# Altium PCB ESP-C3-13-BREAKOUT.PcbDoc
Units mm, origin at the board's own origin, x right, y up, seen from the top; angles counter-clockwise.
Board outline 25.46 x 25.46 mm, 2 copper layers (Top Layer, Bottom Layer), stack 1.57 mm thick; 11 components, 22 nets, 69 pads, 23 vias.
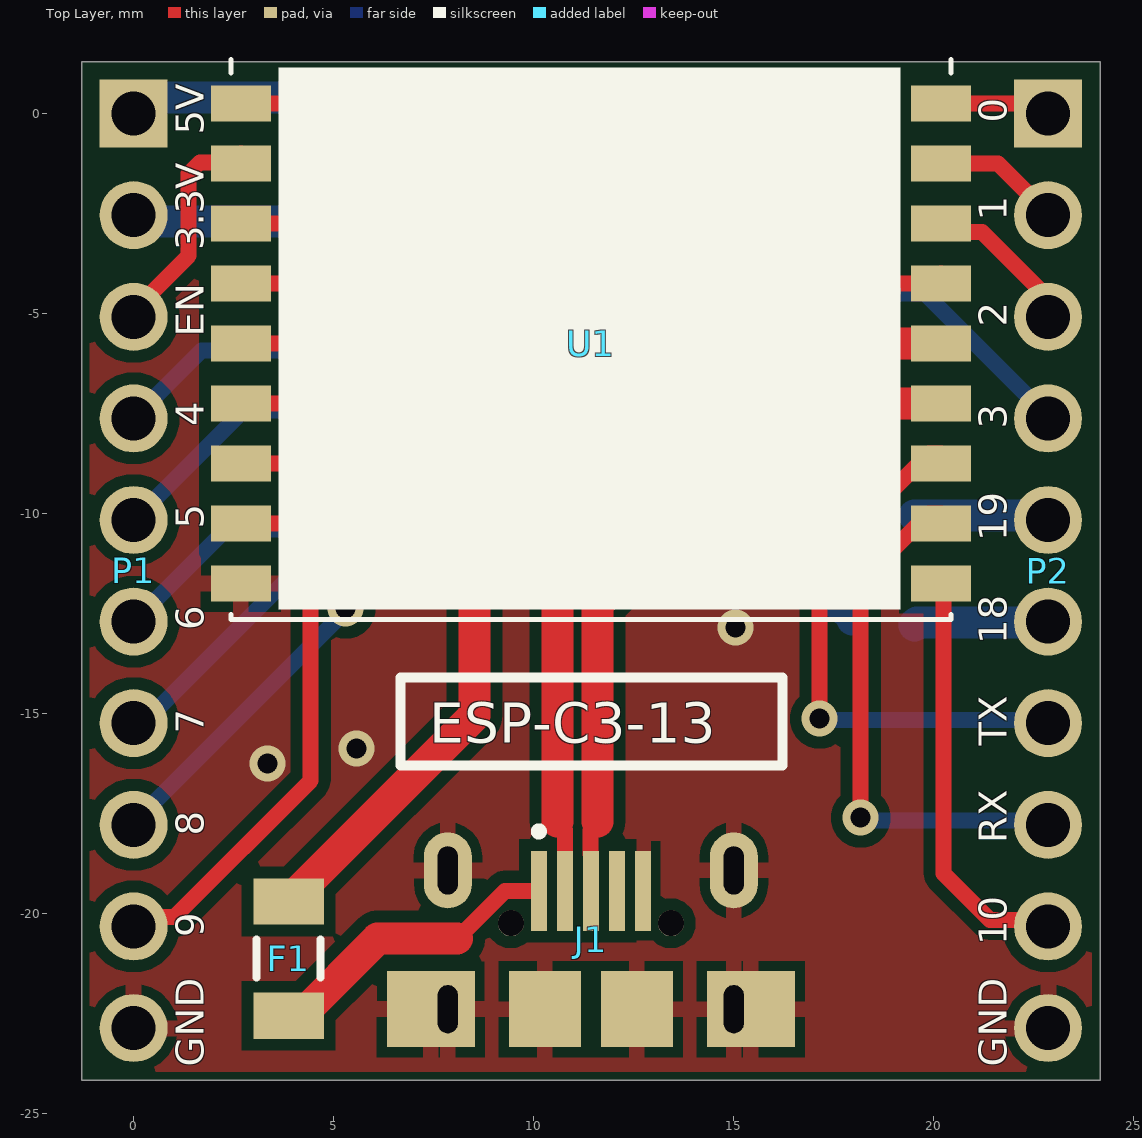
[diagram p0: Top Layer view]
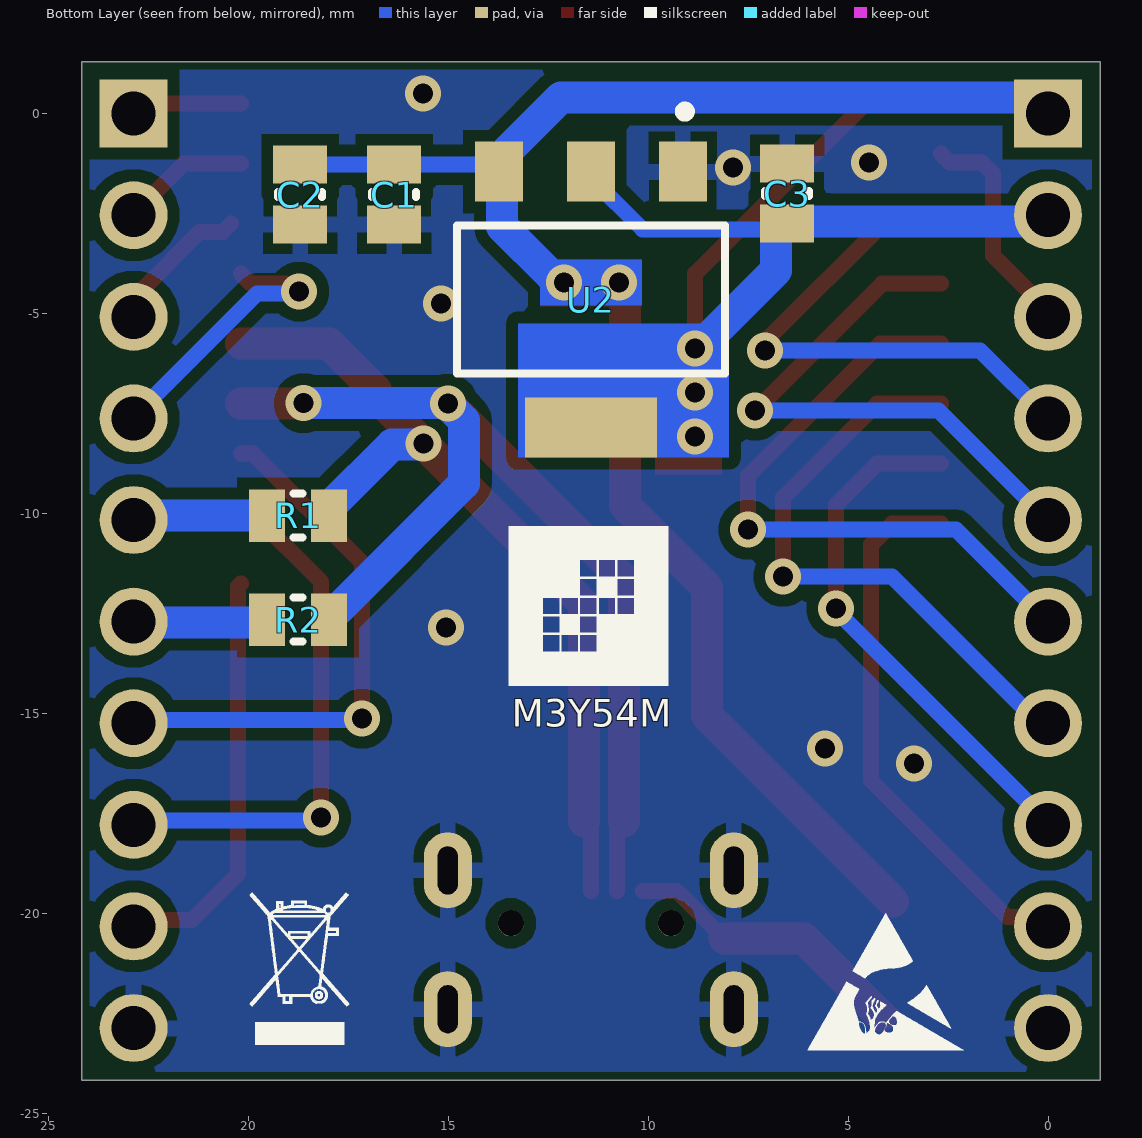
[diagram p1: Bottom Layer view, seen from below]
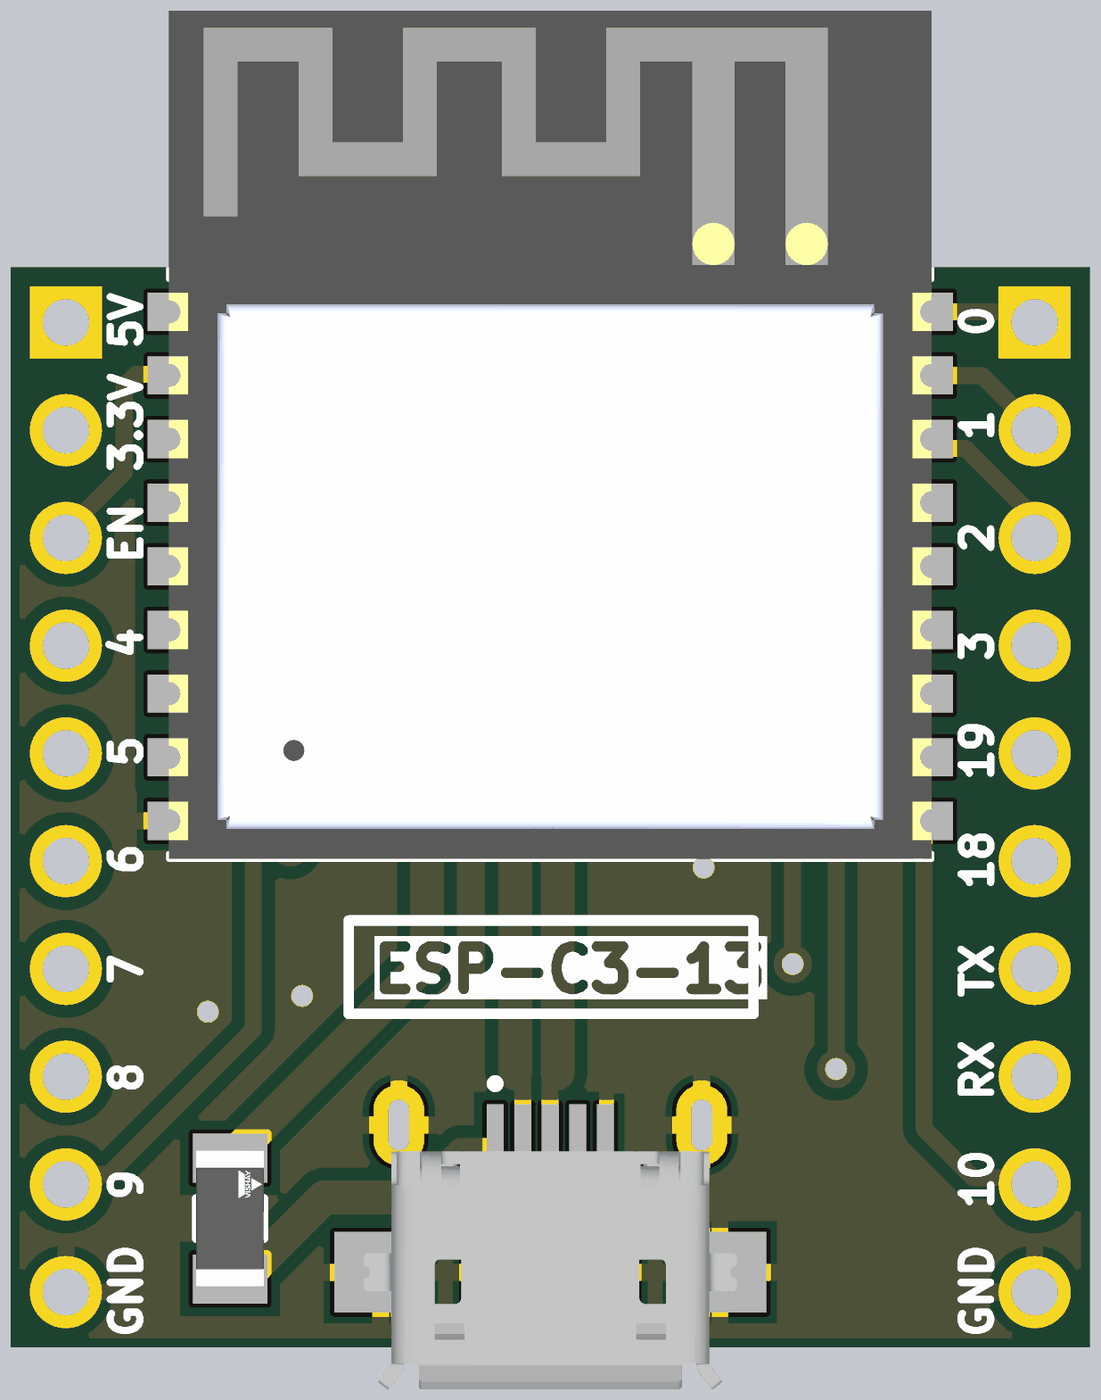
[diagram p2: 3D render of the assembled board from above, using the file's embedded part models]
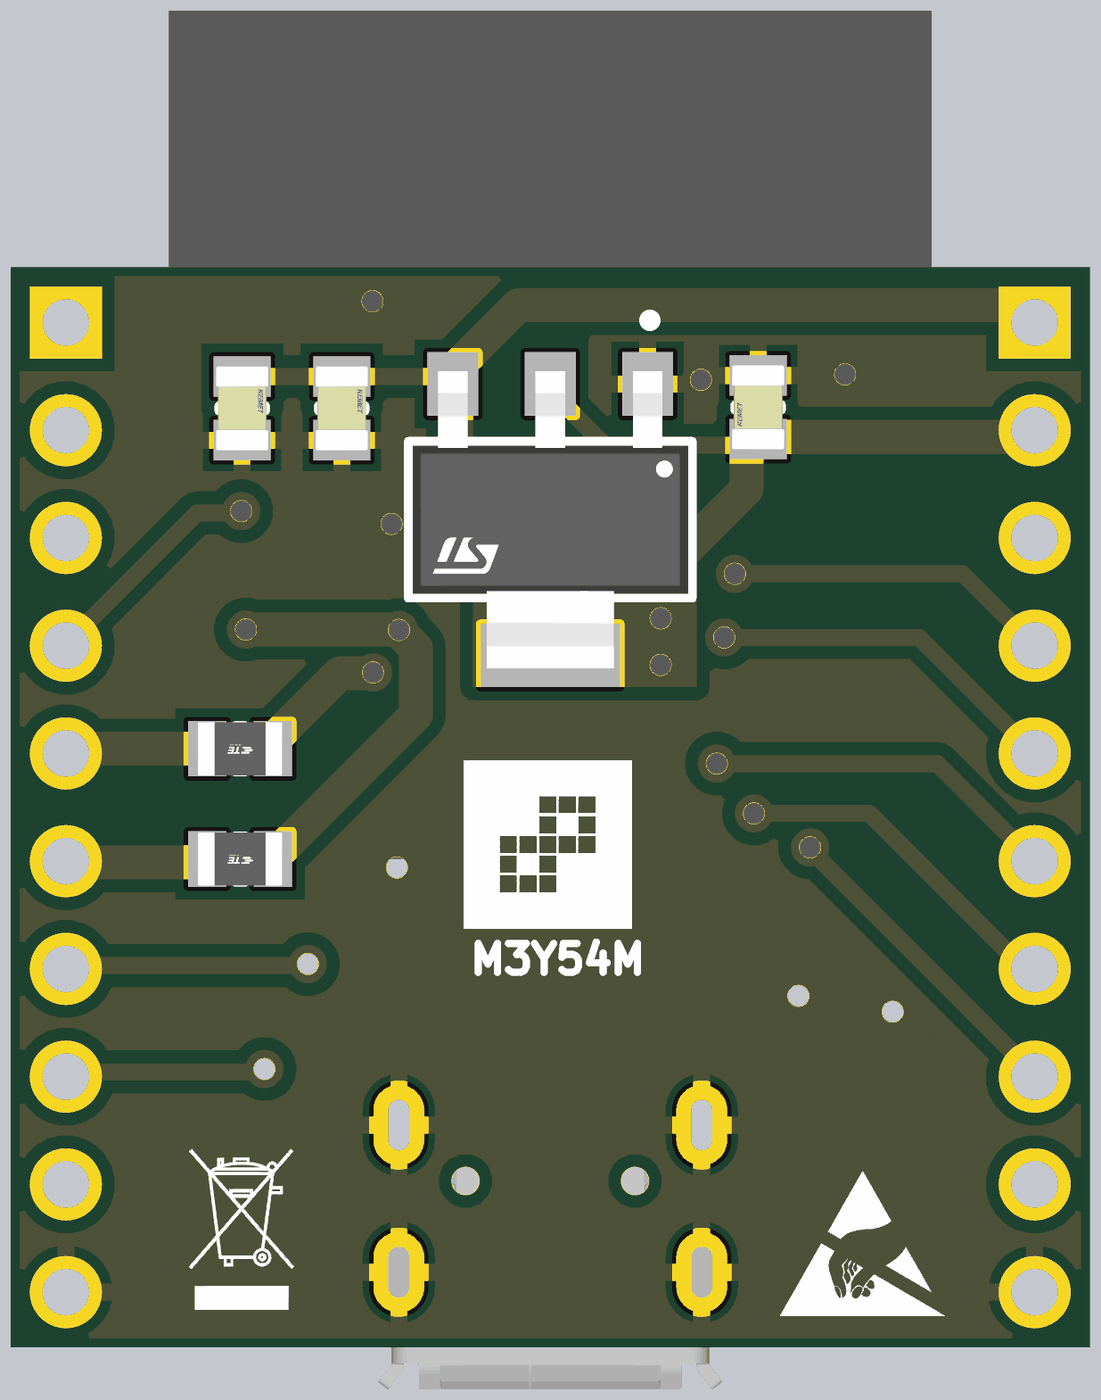
[diagram p3: 3D render of the assembled board from below, using the file's embedded part models]

## Layer stack, top to bottom
Top Solder: solder mask 0.015, Solder Resist, Dk 3.5
Top Layer: signal copper 0.035
Dielectric 1: dielectric 1.5, FR-4, Dk 4.2
Bottom Layer: signal copper 0.035
Bottom Solder: solder mask 0.015, Solder Resist, Dk 3.5

## Board outline
-1.3,-24.16 -1.3,1.3 24.16,1.3 24.16,-24.16

## Design rules (kind name [scope] priority, off if disabled: settings)
BoardOutlineClearance [All] p1: gap=0.2 ignorepadtopadclearanceinfootprint=FALSE
Clearance Clearance_Polygon_Fiducials [All vs InComponent('FID?')] p1: gap=1.3 ignorepadtopadclearanceinfootprint=FALSE
Clearance Clearance_Polygon [InPolygon] p2: gap=0.3 ignorepadtopadclearanceinfootprint=FALSE
Clearance [All] p3: gap=0.15 ignorepadtopadclearanceinfootprint=FALSE except(0: Arc-Hole Track-Hole SMDPad-Hole THPad-Hole Via-Hole Fill-Hole Poly-Hole Region-Hole Text-Hole)
HoleSize [All] p1: absolutevalues=TRUE maxlimit=3.5 minlimit=0.3 maxpercent=80.000 minpercent=20.000
MinimumSolderMaskSliver [All] p1: minsoldermaskwidth=0.15
PolygonConnect PolygonConnect_Via [IsVia] p1: connectstyle=Direct reliefconductorwidth=0.4 reliefentries=4 polygonreliefangle="90 Angle" airgapwidth=0.25
PolygonConnect [All] p2: connectstyle=Relief reliefconductorwidth=0.4 reliefentries=4 polygonreliefangle="90 Angle" airgapwidth=0.25
RoutingVias [All] p1: holewidth=0.4 width=0.7 viastyle="Through Hole" minholewidth=0.4 minwidth=0.6 maxholewidth=2 maxwidth=3
SilkToSilkClearance [All] p1: silktosilkclearance=0.15
SilkToSolderMaskClearance [IsPad] p1: minsilkscreentomaskgap=0.1 clearancetoexposedcopper=TRUE
SolderMaskExpansion SolderMaskExpansion_Via [IsVia] p1: expansion=0.102 istentingtop=TRUE soldermaskfromhole=TRUE
SolderMaskExpansion [All] p2: expansion=0.102 istentingtop=FALSE
Width [All] p1: maxlimit=2 minlimit=0.25 preferedwidth=0.3
26 further rules are at their usual default settings.

## Components (designator, comment, footprint, x,y, rotation, side; value= is the part's Value field where it differs from the comment)
C1 "C0805C104K5RAC7411" C0805 16.35,-2.025 r270 bottom value=10uF_50V
C2 "C0805C104K5RAC7411" C0805 18.7,-2.025 r270 bottom value=100nF_50V
C3 "C0805C104K5RAC7411" C0805 6.525,-2 r90 bottom value=10uF_50V
F1 "NANOSMDC020F-2" R1206 3.875,-21.125 r90 top value=200mA_24V_PTC
J1 "629105150921" CON-MICRO-USB-B-SMD-WITH-HOLDER 11.43,-22.39 r0 top
P1 "CON-HDR-1X10" CON-HDR-1X10-2.54 0,0 r270 top
P2 "CON-HDR-1X10" CON-HDR-1X10-2.54 22.86,0 r270 top
R1 "CRG0805F10K" R0805 18.75,-10.05 r0 bottom value=100
R2 "CRG0805F10K" R0805 18.75,-12.65 r0 bottom value=100
U1 "ESP-C3-13" ESP-C3-13_NO-KEEPOUT 11.43,-2.65 r0 top
U2 "AMS1117-3.3" SOT-223 11.43,-4.65 r270 bottom

## Footprints (in the part's own frame and the unit in brackets; to place one, negate y for a bottom-side part, rotate by r counter-clockwise, add the part's x,y. Pads: shape width x height; smd on the part's side, far side on the other; paste and mask are expansions set on the pad)
C0805 [mm] "FP-C0805C-DN-MFG"
  rect 0.95x1.35 smd: 1(-0.75,0) 2(0.75,0)
  silkscreen extent -0.06,-0.55 0.06,0.55, body extent -1,-0.63 1,0.63, height 0.88
CON-HDR-1X10-2.54 [mm] "Connector; Header; 10 Position, 2.54 Pitch"
  rect 1.7x1.7 hole 1.1 paste-1000 mask+0: 1(0,0)
  round 1.7 hole 1.1 paste-1000 mask+0: 2(2.54,0) 3(5.08,0) 4(7.62,0) 5(10.16,0) 6(12.7,0) 7(15.24,0) 8(17.78,0) 9(20.32,0) 10(22.86,0)
CON-MICRO-USB-B-SMD-WITH-HOLDER [mm] "MICRO USB 5P female seat B type 7.2 four-pin board foot length 1.3 with column curling"
  rect 0.4x2 smd: 1(-1.3,2.96) 2(-0.65,2.96) 3(0,2.96) 4(0.65,2.96) 5(1.3,2.96)
  rect 2.2x1.9 smd: Shell(-4,0) Shell(4,0)
  oval 1.2x1.9 hole 0.5 slot 1.2 at 90 deg: Shell(-3.575,0) Shell(-3.575,3.47) Shell(3.575,0) Shell(3.575,3.47)
  rect 1.8x1.9 smd: Shell(-1.15,0) Shell(1.15,0)
  round 0.65 hole 0.65 paste+0 mask+0: ""(-2,2.15) ""(2,2.15)
  silkscreen extent -1.4,4.35 -1.2,4.54, body extent -4.4,-2.77 4.4,2.86, height 2.79
ESP-C3-13_NO-KEEPOUT [mm]
  rect 1.5x0.9 smd: 1(-8.75,2.9) 2(-8.75,1.4) 3(-8.75,-0.1) 4(-8.75,-1.6) 5(-8.75,-3.1) 6(-8.75,-4.6) 7(-8.75,-6.1) 8(-8.75,-7.6) 9(-8.75,-9.1) 10(8.75,-9.1) 11(8.75,-7.6) 12(8.75,-6.1) 13(8.75,-4.6) 14(8.75,-3.1) 15(8.75,-1.6) 16(8.75,-0.1) 17(8.75,1.4) 18(8.75,2.9)
  silkscreen extent -9,-10 9,4, body extent -9,-10 9,10, height 3.35
R0805 [mm] "FP-CRG0805-IPC_C"
  rect 0.906x1.307 smd: 1(-0.776,0) 2(0.776,0)
  silkscreen extent -0.11,-0.55 0.11,0.55, body extent -1,-0.63 1,0.63, height 0.65
R1206 [mm] "FP-CRCW1206-e3-IPC_B"
  rect 1.156x1.758 smd: 1(-1.426,0) 2(1.426,0)
  silkscreen extent -0.47,-0.8 0.47,0.8, body extent -2.25,-1.13 2.25,1.13, height 0.25
SOT-223 [mm]
  rect 1.5x1.2 smd: 1(-3.2,2.3) 2(-3.2,0) 3(-3.2,-2.3)
  rect 1.5x3.3 smd: 4(3.2,0)
  silkscreen extent -4.82,-3.35 1.85,3.35, body extent -3.5,-3.25 3.5,3.25, height 1.9

## Part data
C1 C2 C3: library part CAPACITOR, "C0805 0.10 μF X7R 30ppm/°C 10.00% 50 V", Capacitance=100nF, Manufacturer=KEMET, Package=C0805C-DN, Temperature="-55°C to +125°C", Temperature Characteristic=X7R, Temperature Coefficient=30ppm/°C, Temperature Range High=+125°C, Temperature Range Low=-55°C, Tolerance=0.1, Voltage Rating="50 V", Automotive=No, Category=Cap, ComponentLink2Description=Datasheet, ComponentLink2URL=https://content.kemet.com/datasheets/KEM_C1003_C0G_SMD.pdf, Device Class L1="Passive Components", Device Class L2=Capacitors, Device Class L3="Ceramic Capacitors", Height=0.88mm, Ipc Land Pattern Name=CAPC200125X78, Lead Free=Yes, Manufacturer Part Number=C0805C104K5RAC7411, Material=Ceramic, Octopart=https://octopart.com/c0805c104k5rac7411-kemet-18508045, RoHS=TRUE
F1: library part FUSE-PTC, "FUSE PPTC 200MA (1206) 24V RESETTABLE"
J1: library part CON-MICRO-USB-AB-RCPT-SMD, "Micro USB 2.0 Type AB Receptacle WR-COM, Horizontal, SMT", Contact Resistance=30mOhm, Manufacturer="Wurth Elektronik", Operating Temperature=-40to85degC, Rated Current=1.8A, Working Voltage=30VAC, Connector Type=MicroUSB2.0TypeAB, Datasheet URL=https://katalog.we-online.de/em/datasheet/629105150921.pdf, Gender=Receptacle, Manufacturer URL=http://www.we-online.de, Mounting Technology=SMT, Orientation=Horizontal, Package Reference=629105150921, Packaging=TapeandReel, Part Number=629105150921, Publisher=WurthElektronik
P1 P2: "Pin Header, 10-Pin", LatestRevisionDate=17-Jul-2002, LatestRevisionNote="Re-released for DXP Platform.", Publisher="Altium Limited"
R1 R2: library part RESISTOR, "RES SMD 10K OHM 1% 1/8W 0805", Case/Package=0805, Max Operating Temperature=125°C, Min Operating Temperature=-55°C, Number of Resistors=1, Power Rating=125mW, Resistor Type="Thick Film", Temperature Coefficient=100ppm/°C, Tolerance=1%, Voltage Rating=150V, Depth=1.25mm, ELV=Compliant, Height=0.55mm, Length=2mm, Mount="Surface Mount", Number of Terminations=2, Packaging="Tape and Reel", Radiation Hardening=No, RoHS Compliant=Yes, Series="CRG Series", Technology="THICK FILM", Termination=Solder
U1: "WiFi Modules (802.11) (Engineering Samples) SMD module, ESP32-C3, 4MB SPI flash, PCB antenna, -40 C +85 C", Package=Package, Availability="In Stock", Check_prices=https://www.snapeda.com/parts/ESP32-C3-WROOM-02-N4/Espressif+Systems/view-part/?ref=eda, MF="Espressif Systems", MP=ESP32-C3-WROOM-02-N4, Price=None, Purchase-URL=https://pricing.snapeda.com/search/part/ESP32-C3-WROOM-02-N4/?ref=eda, SnapEDA_Link=https://www.snapeda.com/parts/ESP32-C3-WROOM-02-N4/Espressif+Systems/view-part/?ref=snap
U2: library part LD1117, "IC REG LINEAR 3.3V 800MA SOT223", Case/Package=SOT-223, Dropout Voltage=1.1V, Input Bias Current=5mA, Max Input Voltage=15V, Max Operating Temperature=125°C, Max Output Current=1.3A, Max Output Voltage=3.3V, Max Power Dissipation=12W, Min Input Voltage=5.3V, Min Operating Temperature=-40°C, Output Current=950mA, Output Voltage Accuracy=1%, Package Quantity=1, Quiescent Current=10mA, Accuracy=1%, Contact Plating=Tin, Height=1.8mm, Lead Free="Lead Free", Length=6.5mm, Max Supply Voltage=15V, Min Output Voltage=3.3V, Min Supply Voltage=3.3V, Mount="Surface Mount", Nominal Output Voltage=3.3V, Number of Outputs=1, Number of Pins=4, Number of Regulators=1, Number of Terminals=4, Output Type=Fixed, Output Voltage=3.3V, Packaging="Tape and Reel", Polarity=Positive, Power Dissipation=12W, Radiation Hardening=No, REACH SVHC="No SVHC", Termination=SMD/SMT, Weight=0.01lb, Width=3.5mm

## Via types
v1: diameter 0.9, hole 0.5, Top Layer to Bottom Layer, tented both sides, 23 vias

## Nets (pads, with @x,y where several pads share a name; then routed paths per layer and width w, separated by ;. In a path a pad name is that pad's centre, name@x,y a point inside that pad or via, vN(x,y) a via of type N, cw(c..) or ccw(c..) an arc to the next point about the centre after c; other vN are vias at no path point)
+3V3: C3.1 P1.2 U1.1 U2.2 U2.4 | length 30.2
  Top Layer w0.4: U1.1 4.575,0.25 8.825,-4 v1(8.825,-5.875)
  Bottom Layer w0.4: C3.1 6.671,-2.896 6.8,-2.896 10.134,-2.896 11.43,-1.6 U2.2
  Bottom Layer w0.8: P1.2 0.16,-2.7 6.675,-2.7 6.8,-2.825 6.8,-2.896 6.8,-3.925 10.18,-7.305 10.18,-7.5 10.392,-7.712 U2.4@11.388,-7.712 ; U2.4@11.105,-8.175 U2.4
  other v1: 8.825,-8.075 8.825,-6.975
+5V: C1.1 C2.1 F1.2 P1.1 U2.3 | length 43.4
  Top Layer w0.8: F1.2 8.525,-15.049 8.525,-11.85 10.575,-9.8 10.575,-4.375 v1(10.725,-4.225)
  Bottom Layer w0.4: U2.3 13.905,-1.275 C1.1 C2.1
  Bottom Layer w0.8: P1.1 0.405,0.405 12.181,0.405 13.53,-0.944 13.53,-1.25 U2.3 13.652,-1.528 13.652,-2.819 12.421,-4.05 12.275,-4.05 v1(12.1,-4.225) ; v1@10.55,-4.4 v1(10.725,-4.225) v1(12.1,-4.225) ; v1@12.125,-4.225 v1(12.1,-4.225)
EN: P1.3 U1.2 | length 5.7
  Top Layer w0.4: P1.3 0,-4.925 1.375,-3.55 1.375,-1.5 1.653,-1.222 2.458,-1.222 U1.2@2.68,-1
GND: C1.2 C2.2 C3.2 J1.5 J1.Shell P1.10 P2.10 U1.9 U2.1
  other v1: 3.35,-16.25 5.575,-15.875 15.05,-12.85 15.175,-4.75 7.875,-1.35 4.475,-1.225 15.625,0.5
GPIO0: P2.1 U1.18 | length 2.8
  Top Layer w0.4: U1.18 22.65,0.25 P2.1@22.86,0.04
GPIO1: P2.2 U1.17 | length 3.2
  Top Layer w0.4: U1.17 21.61,-1.25 P2.2@22.86,-2.5
GPIO2: P2.3 U1.16 | length 3.6
  Top Layer w0.4: U1.16@20.43,-2.75 20.644,-2.964 21.214,-2.964 22.611,-4.361 22.611,-4.791 P2.3@22.86,-5.04
GPIO3: P2.4 U1.15 | length 7.1
  Top Layer w0.4: v1(18.723,-4.447) 18.858,-4.447 19.055,-4.25 19.93,-4.25 U1.15@20.18,-4
  Bottom Layer w0.4: v1(18.723,-4.447) 18.768,-4.493 19.773,-4.493 P2.4@22.86,-7.58
GPIO4: P1.4 U1.3 | length 13.6
  Top Layer w0.4: U1.3 4.125,-2.75 6.979,-5.604 6.979,-5.829 v1(7.075,-5.925)
  Bottom Layer w0.4: P1.4 1.695,-5.925 v1(7.075,-5.925)
GPIO5: P1.5 U1.4 | length 14.4
  Top Layer w0.4: U1.4 4.15,-4.25 v1(7.325,-7.425)
  Bottom Layer w0.4: P1.5 2.735,-7.425 v1(7.325,-7.425)
GPIO6: P1.6 U1.5 | length 16
  Top Layer w0.4: U1.5 4.2,-5.75 7.5,-9.05 v1(7.5,-10.4)
  Bottom Layer w0.4: P1.6 2.3,-10.4 v1(7.5,-10.4)
GPIO7: P1.7 U1.6 | length 15
  Top Layer w0.4: U1.6 4.275,-7.25 6.625,-9.6 v1(6.625,-11.575)
  Bottom Layer w0.4: P1.7 0.235,-15.24 3.9,-11.575 v1(6.625,-11.575)
GPIO8: P1.8 U1.7 | length 13.2
  Top Layer w0.4: U1.7 4.275,-8.75 5.3,-9.775 v1(5.3,-12.375)
  Bottom Layer w0.4: P1.8 0,-17.728 5.3,-12.428 v1(5.3,-12.375)
GPIO9: P1.9 U1.8 | length 13.8
  Top Layer w0.4: P1.9 0.235,-20.085 1.015,-20.085 4.425,-16.675 4.425,-10.775 3.9,-10.25 U1.8
GPIO10: P2.9 U1.10 | length 10.4
  Top Layer w0.4: U1.10 20.25,-11.82 20.25,-19 21.41,-20.16 22.74,-20.16 P2.9@22.86,-20.28
GPIO18: J1.2 R2.1 U1.13 | length 26.3
  Top Layer w0.4: 10.575,-17.7 10.78,-17.905 J1.2
  Top Layer w0.8: 10.6,-17.7 10.6,-11.65 v1(15,-7.25) ; v1(18.611,-7.239) 18.616,-7.245 20.175,-7.245 U1.13
  Bottom Layer w0.8: R2.1 17.974,-12.449 17.921,-12.396 17.754,-12.396 14.6,-9.243 14.6,-7.677 15,-7.277 v1(15,-7.25) 15.011,-7.239 v1(18.611,-7.239)
GPIO19: J1.3 R1.1 U1.14 | length 21.9
  Top Layer w0.4: J1.3 11.43,-18.513 11.425,-18.508 11.425,-17.925 11.65,-17.7
  Top Layer w0.8: 11.6,-17.7 11.6,-12.264 v1(15.612,-8.252) ; v1@15.58,-8.219 15.645,-8.219 16.803,-7.061 16.803,-6.922 17.975,-5.75 U1.14
  Bottom Layer w0.8: v1(15.612,-8.252) 15.632,-8.271 16.395,-8.271 17.974,-9.849 R1.1
NetF1_1: F1.1 J1.1 | length 7.5
  Top Layer w0.4: F1.1 F1.1@4.176,-22.551 ; 8.09,-20.625 9.285,-19.43 J1.1
  Top Layer w0.8: F1.1@4.176,-22.551 6.102,-20.625 8.09,-20.625
NetP2_5: P2.5 R1.2 | length 3.4
  Bottom Layer w0.8: R1.2 22.75,-10.05 P2.5
NetP2_6: P2.6 R2.2 | length 3.4
  Bottom Layer w0.8: R2.2@19.526,-12.8 19.526,-12.778 19.579,-12.725 22.835,-12.725 P2.6
RXD: P2.8 U1.11 | length 13.3
  Top Layer w0.4: v1(18.175,-17.6) 18.175,-11.705 19.88,-10 U1.11@20.18,-10
  Bottom Layer w0.4: v1(18.175,-17.6) 18.245,-17.67 22.79,-17.67 P2.8@22.86,-17.74
TXD: P2.7 U1.12 | length 13.8
  Top Layer w0.4: v1(17.15,-15.125) 17.15,-11.23 19.88,-8.5 U1.12@20.18,-8.5
  Bottom Layer w0.4: v1(17.15,-15.125) 17.188,-15.162 22.822,-15.162 P2.7@22.86,-15.2
pads on no net: J1. J1.4

## Polygon pours and split planes (outlines as drawn)
GND on Bottom Layer "GND_L02_P000" (solid, remove dead copper, pour order 0): -1.3,-24.16 -1.3,1.3 24.16,1.3 24.16,-24.16
GND on Top Layer "GND_L01_P001" (solid, remove dead copper, pour order 1): -1.3,-24.16 -1.3,1.3 24.16,1.3 24.16,-24.16

## Other copper
Top Layer:
  rectangle net +3V3: 8.15,-9.025 9.825,-5.275
  rectangle net +5V: 10.175,-4.825 12.7,-3.65
Bottom Layer:
  rectangle net +5V: 10.15,-4.8 12.7,-3.65
  rectangle net +3V3: 7.975,-8.6 13.25,-5.25

## Silkscreen, mask and mechanical layers (free items; w line width, h text height)
Top Overlay:
  rectangle: 3.625,-12.4 19.175,1.15
  lines w0.25: 6.675,-16.3 16.225,-16.3 16.225,-14.1 6.675,-14.1 6.675,-16.3
  text "0" at 21.83,-0.23 h0.7 r90
  text "5V" at 1.755,-0.525 h0.7 r90
  text "1" at 21.83,-2.68 h0.7 r90
  text "3.3V" at 1.755,-3.422 h0.7 r90
  text "2" at 21.83,-5.33 h0.7 r90
  text "EN" at 1.755,-5.58 h0.7 r90
  text "4" at 1.755,-7.822 h0.7 r90
  text "3" at 21.83,-7.88 h0.7 r90
  text "5" at 1.755,-10.373 h0.7 r90
  text "19" at 21.83,-10.688 h0.7 r90
  text "6" at 1.755,-12.917 h0.7 r90
  text "18" at 21.83,-13.265 h0.7 r90
  text "7" at 1.755,-15.508 h0.7 r90
  text "ESP-C3-13" at 7.392,-15.725 h1
  text "TX" at 21.83,-15.808 h0.7 r90
  text "8" at 1.755,-18.058 h0.7 r90
  text "RX" at 21.83,-18.245 h0.7 r90
  text "9" at 1.755,-20.592 h0.7 r90
  text "10" at 21.83,-20.79 h0.7 r90
  text "GND" at 1.755,-23.828 h0.7 r90
  text "GND" at 21.83,-23.828 h0.7 r90
Bottom Overlay:
  drawing of 7 lines, arcs and shapes, not listed
  text "M3Y54M" at 13.41,-15.329 h0.68
Mechanical 1:
  the board outline again, w0.1

## Text inside footprints (layer, text, board x,y; h text height)
J1: Top 3D Body "PCB Edge" at 9.906,-24.168 h0.41